# Altium PCB PCB.PcbDoc
Units mm, origin at the board's own origin, x right, y up, seen from the top; angles counter-clockwise.
Board outline 21 x 31 mm, 2 copper layers (Top Layer, Bottom Layer); 5 components, 5 nets, 21 pads, 1 vias.
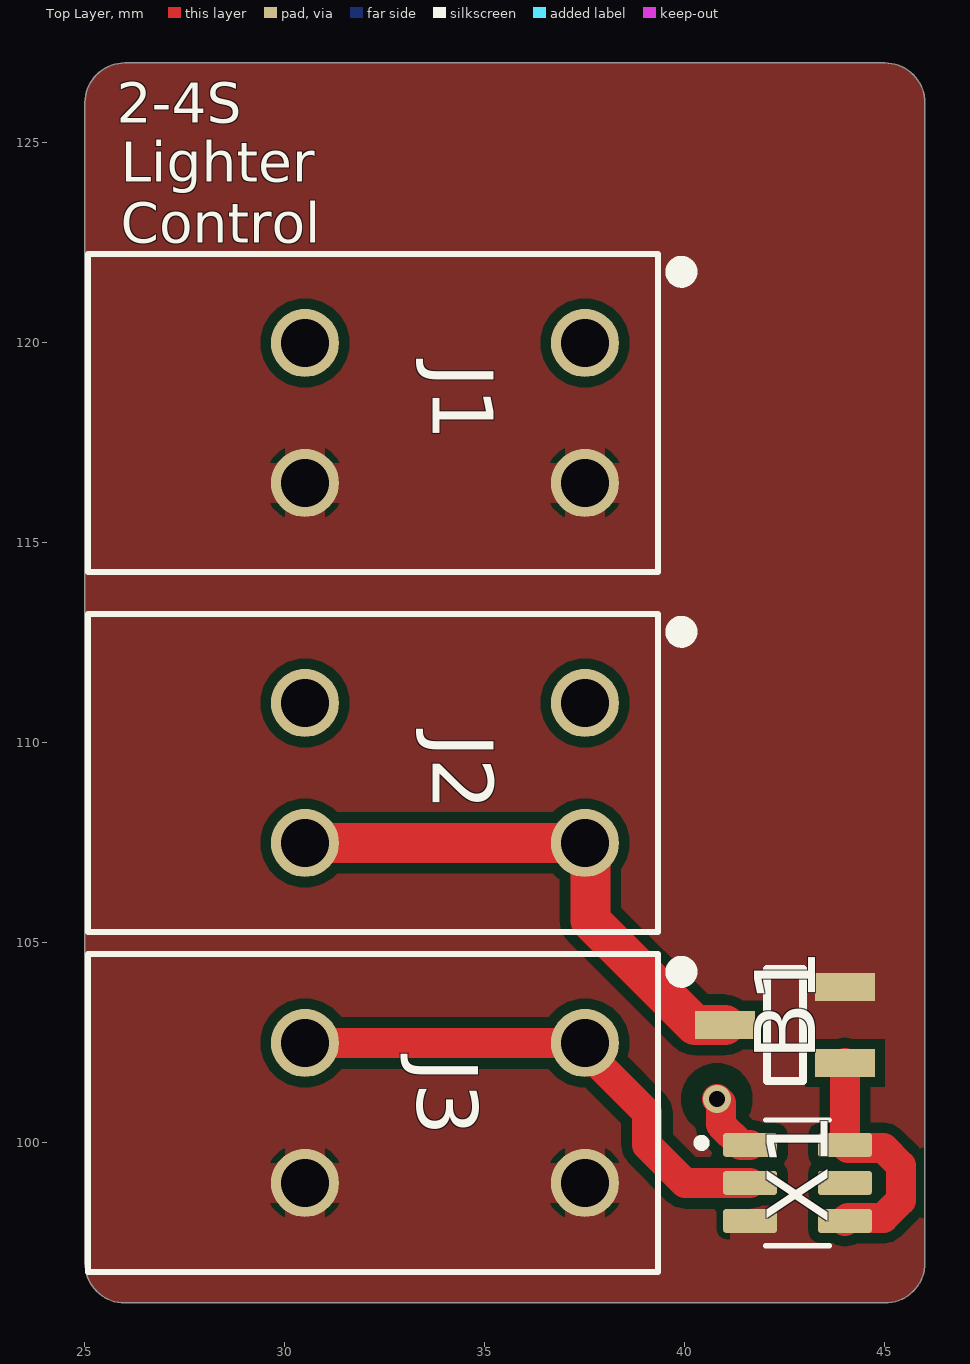
[diagram p0: Top Layer view]
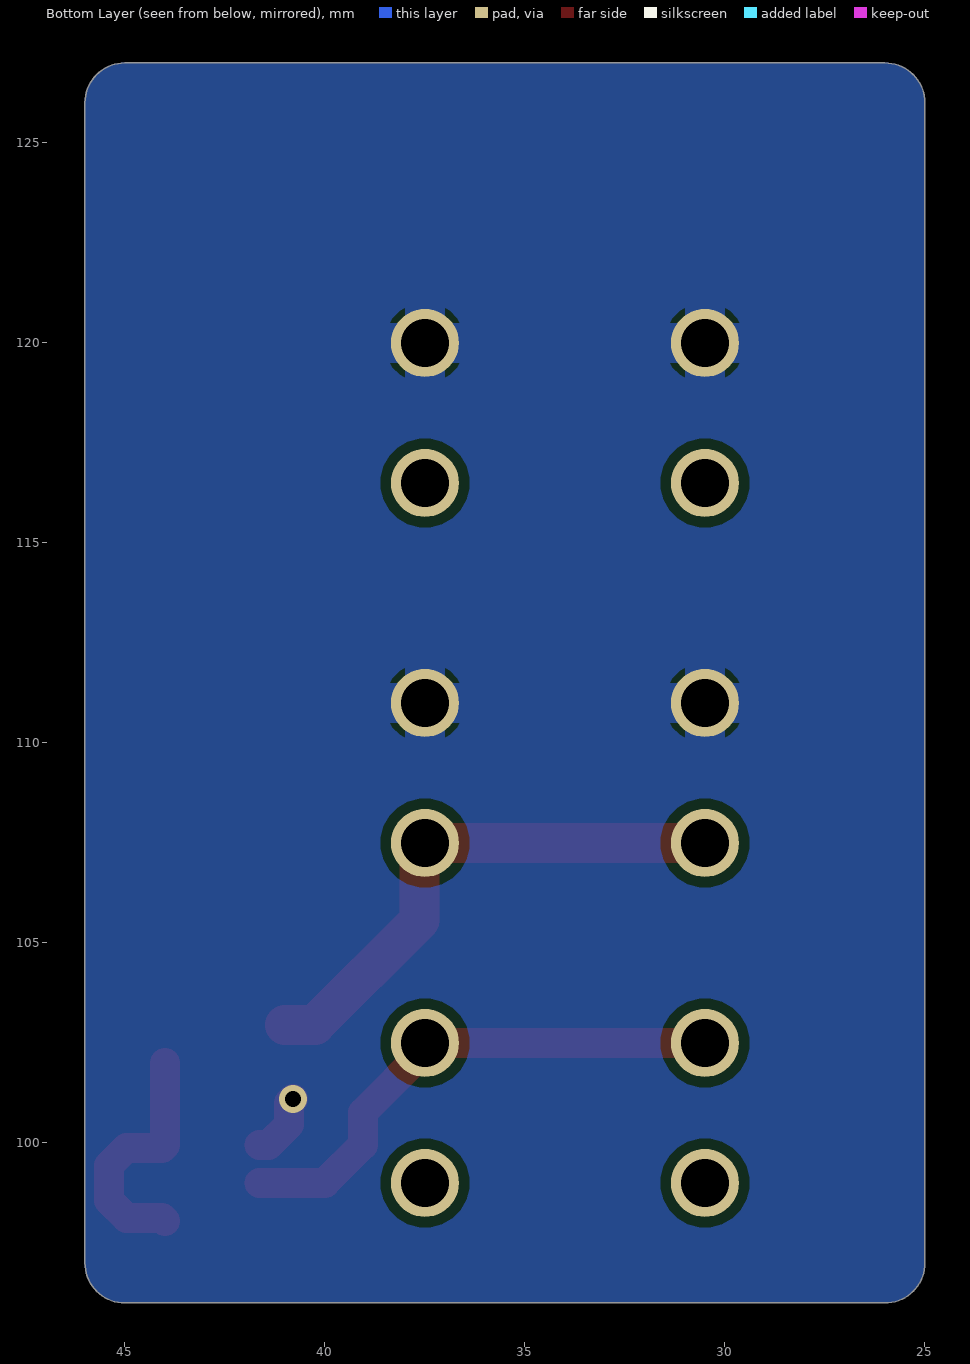
[diagram p1: Bottom Layer view, seen from below]

## Layer stack, top to bottom
Top Solder: solder mask 0.0102, Solder Resist, Dk 3.5
Top Layer: signal copper 0.0356
Dielectric 1: dielectric 0.32, FR-4, Dk 4.8
Bottom Layer: signal copper 0.0356
Bottom Solder: solder mask 0.0102, Solder Resist, Dk 3.5

## Board outline
26,96 cw(c26,97) 25,97 25,126 cw(c26,126) 26,127 45,127 cw(c45,126) 46,126 46,97 cw(c45,97) 45,96

## Design rules (kind name [scope] priority, off if disabled: settings)
Clearance [All] p1: gap=0.254 ignorepadtopadclearanceinfootprint=FALSE except(0: SMDPad-Hole THPad-Hole Via-Hole Fill-Hole Poly-Hole Region-Hole Text-Hole; 0.127: Arc-Arc Arc-Track Track-Track SMDPad-SMDPad; 0.15: Arc-Text Track-Text SMDPad-Text THPad-Text Via-Text Text-Text; 0.2: Arc-SMDPad Arc-THPad Track-SMDPad Track-THPad Fill-Text Poly-Text Region-Text; 0.5: THPad-THPad)
Height [All] p1: minheight=0 maxheight=50 prefheight=12.7
HoleSize [All] p1: absolutevalues=TRUE maxlimit=3.2 minlimit=0.025 maxpercent=80.000 minpercent=20.000
MinimumSolderMaskSliver [OnLayer('Top Layer') vs OnLayer('Top Layer')] p1: minsoldermaskwidth=0.04
PlaneConnect [All] p1: planeconnectstyle=Relief reliefexpansion=0.508 reliefentries=4 reliefconductorwidth=0.3 reliefairgap=0.18
PolygonConnect [All] p1: thpad.connectstyle=Relief thpad.reliefconductorwidth=1.016 thpad.reliefentries=4 thpad.polygonreliefangle="90 Angle" thpad.airgapwidth=0.15 smdpad.connectstyle=Relief smdpad.reliefconductorwidth=1.016 smdpad.reliefentries=4 smdpad.polygonreliefangle="90 Angle" smdpad.airgapwidth=0.15 via.connectstyle=Direct via.reliefconductorwidth=1.016 via.reliefentries=4 via.polygonreliefangle="90 Angle" via.airgapwidth=0.15
RoutingVias [All] p1: holewidth=0.3 width=0.5 viastyle="Through Hole" minholewidth=0.2 minwidth=0.45 maxholewidth=2 maxwidth=3
SilkToSilkClearance [All] p1: silktosilkclearance=0.1
SilkToSolderMaskClearance [IsPad] p1: minsilkscreentomaskgap=0 clearancetoexposedcopper=TRUE
SolderMaskExpansion SolderMaskExpansion_1 [All] p1: expansion=0.102 istentingtop=FALSE
SolderMaskExpansion SolderMaskExpansion_Via [All] p2: expansion=-25 istentingtop=TRUE
Width [All] p1: maxlimit=10 minlimit=0.127 preferedwidth=0.54 minimp=50.000000 maximp=50.000000 favimp=50.000000
24 further rules are at their usual default settings.

## Components (designator, comment, footprint, x,y, rotation, side; value= is the part's Value field where it differs from the comment)
B1 "N Kanal FET" SOT23-3 42.5,102.95 r90 top
J1 "1824420000" CONN2_1824420000_WED 37.5,120 r270 top
J2 "1824420000" CONN2_1824420000_WED 37.5,111 r270 top
J3 "1824420000" CONN2_1824420000_WED 37.5,102.5 r270 top
X1 "ZXGD3005E6TA" SOT26 42.815,99 r0 top

## Footprints (in the part's own frame and the unit in brackets; to place one, negate y for a bottom-side part, rotate by r counter-clockwise, add the part's x,y. Pads: shape width x height; smd on the part's side, far side on the other; paste and mask are expansions set on the pad)
CONN2_1824420000_WED [mil]
  round 67 hole 47 mask+0: 1(0,0) 2(0,-275.59) 3(137.8,0) 4(137.8,-275.59)
  silkscreen extent -88,-489 225,103, body extent 0,0 10,10, height 10
SOT23-3 [mm] "SOT23-3"
  rect 0.7x1.5 smd: 1(-0.95,-1.5) 2(0.95,-1.5) 3(0,1.5)
  silkscreen extent -1.4,-0.45 1.4,0.45, body extent -1.45,-1.4 1.45,1.4, height 1.3
SOT26 [mm]
  rrect25% 1.35x0.6 smd: 1(-1.185,0.95) 2(-1.185,0) 3(-1.185,-0.95) 4(1.185,-0.95) 5(1.185,0) 6(1.185,0.95)
  silkscreen extent -2.5,-1.57 0.8,1.57

## Part data
J1 J2 J3: "No Description Available", Mfr_Name=Weidmuller, Copyright="Copyright (C) 2021 Ultra Librarian. All rights reserved.", Digi-Key_Part_Number_1=281-2020-ND, Manufacturer_Part_Number=1824420000, RefDes=RefDes, Type=DEV
X1: "Low-Side Gate Driver IC Non-Inverting SOT-26", Package=None, Availability=Unavailable, MP=ZXGD3005E6TA, Price=None

## Via types
v1: diameter 0.7, hole 0.4, Top Layer to Bottom Layer, 1 vias

## Nets (pads, with @x,y where several pads share a name; then routed paths per layer and width w, separated by ;. In a path a pad name is that pad's centre, name@x,y a point inside that pad or via, vN(x,y) a via of type N, cw(c..) or ccw(c..) an arc to the next point about the centre after c; other vN are vias at no path point)
GND: B1.2 J1.3 J1.4 J3.3 J3.4 X1.3
NetB1_1: B1.1 X1.4 X1.6 | length 6.1
  Top Layer w0.75: X1.4 44.075,98.125 44.961,98.125 45.4,98.564 45.4,99.436 44.961,99.875 44.075,99.875 X1.6 B1.1
NetB1_3: B1.3 J2.3 J2.4 | length 13.4
  Top Layer w1: J2.4 J2.3 37.634,107.366 37.634,105.566 40.25,102.95 B1.3
NetJ3_1: J3.1 J3.2 X1.2 | length 13.2
  Top Layer w0.75: J3.2 J3.1 37.5,102.31 39.048,100.762 39.048,99.951 40,99 X1.2
VCC: J1.1 J1.2 J2.1 J2.2 X1.1 | length 1.6
  Top Layer w0.75: v1(40.8,101.1) 40.899,101.001 40.899,100.456 41.405,99.95 X1.1
pads on no net: X1.5

## Polygon pours and split planes (outlines as drawn)
GND on Top Layer "NONET_L-01_P-001" (solid, pour order 0): 26,96 cw(c26,97) 25,97 25,126 cw(c26,126) 26,127 45,127 cw(c45,126) 46,126 46,97 cw(c45,97) 45,96
VCC on Bottom Layer "NONET_L-01_P-001" (solid, pour order 1): 26,96 cw(c26,97) 25,97 25,126 cw(c26,126) 26,127 45,127 cw(c45,126) 46,126 46,97 cw(c45,97) 45,96

## Silkscreen, mask and mechanical layers (free items; w line width, h text height)
Top Overlay:
  text "2-4S" at 25.8,125.5 h1
  text "Lighter" at 25.9,124.033 h1
  text "Control" at 25.9,122.5 h1
Mechanical 1:
  the board outline again, w0.127